# Altium PCB RPlan_LB1.PcbDoc
Units mm, origin at the board's own origin, x right, y up, seen from the top; angles counter-clockwise.
Board outline 38.2 x 43.2 mm, 2 copper layers (Top Layer, Bottom Layer); 57 components, 101 nets, 275 pads, 55 vias.
Unrouted connection lines stored in the file: 1.
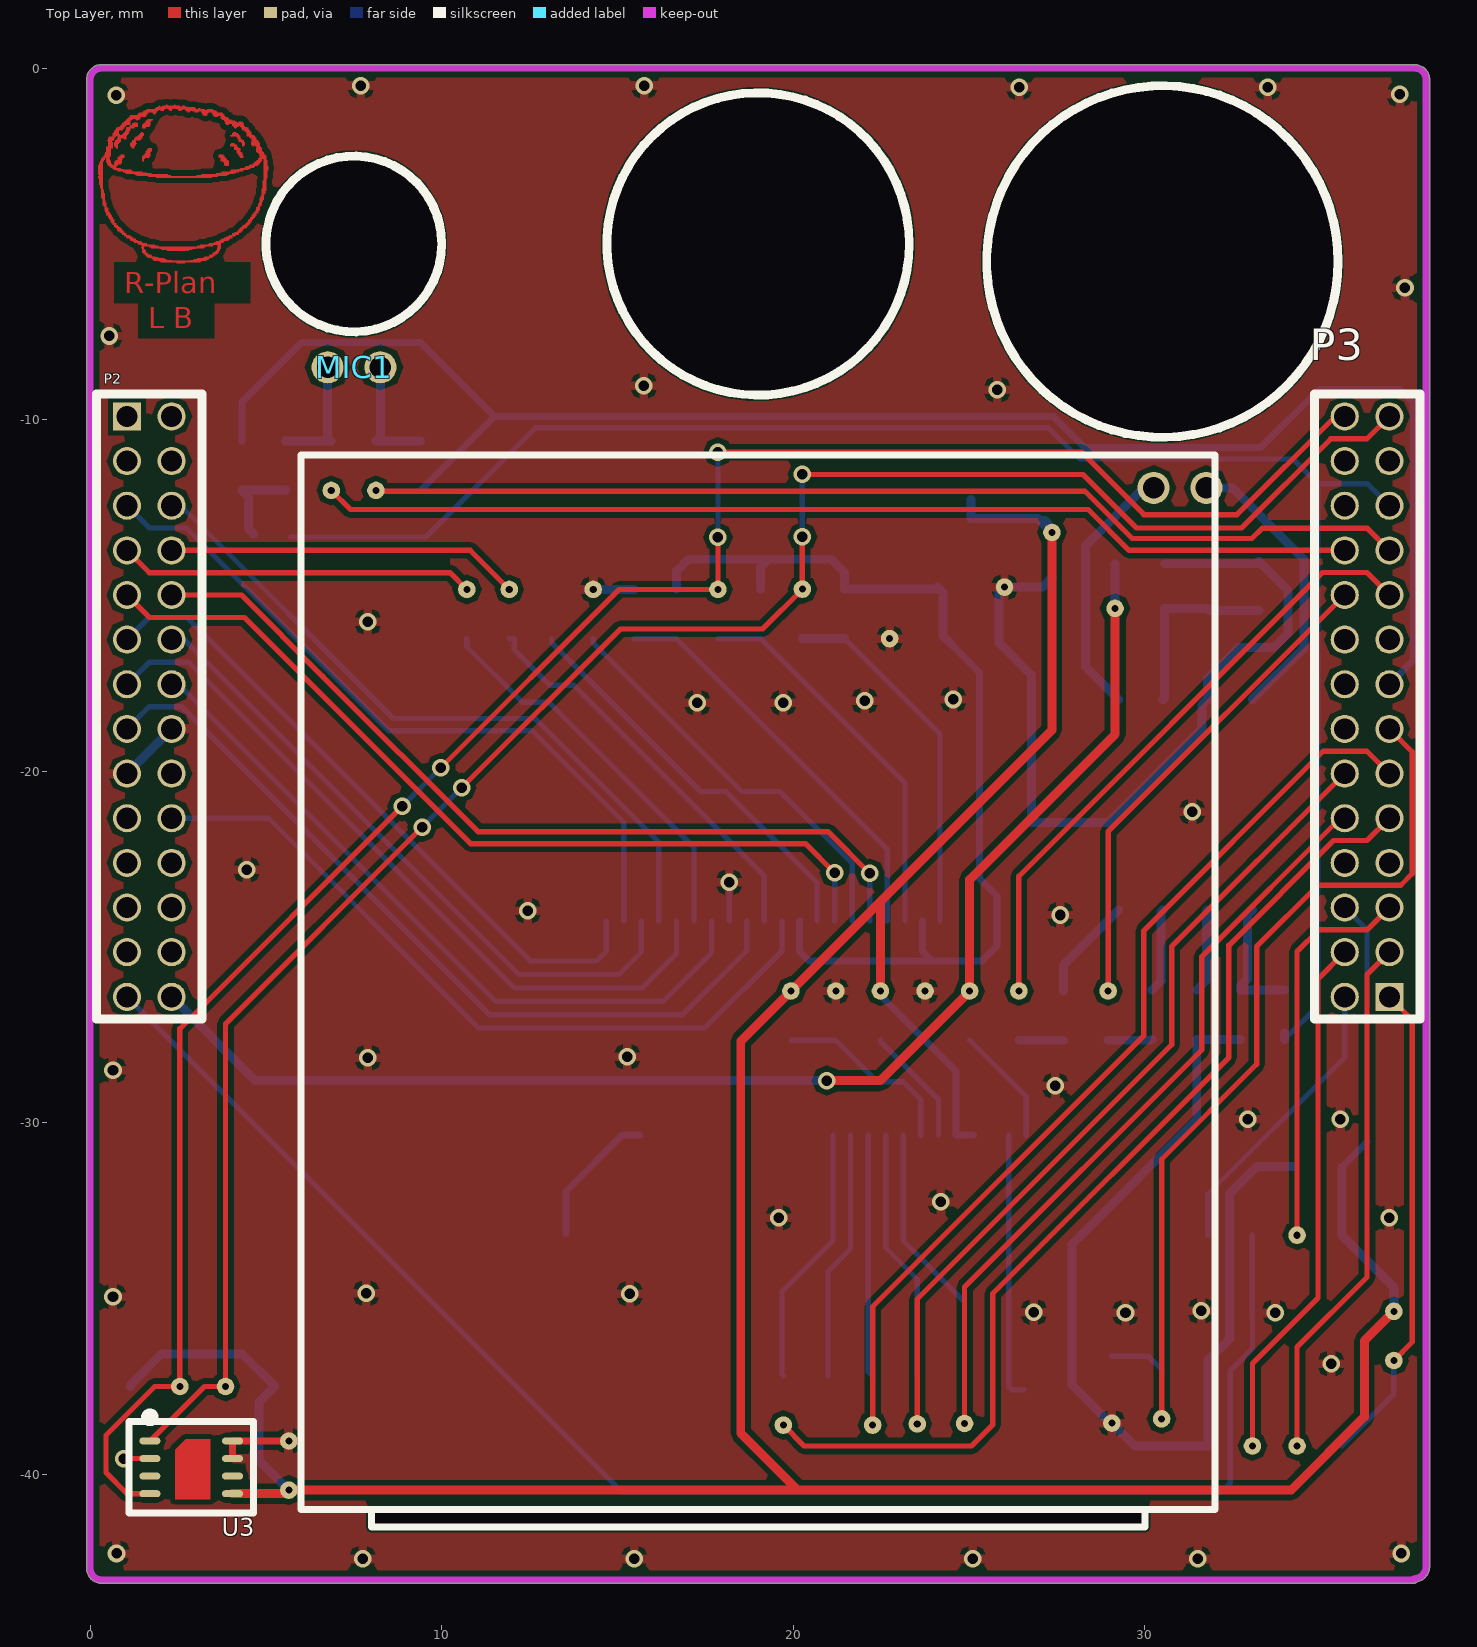
[diagram p0: Top Layer view]
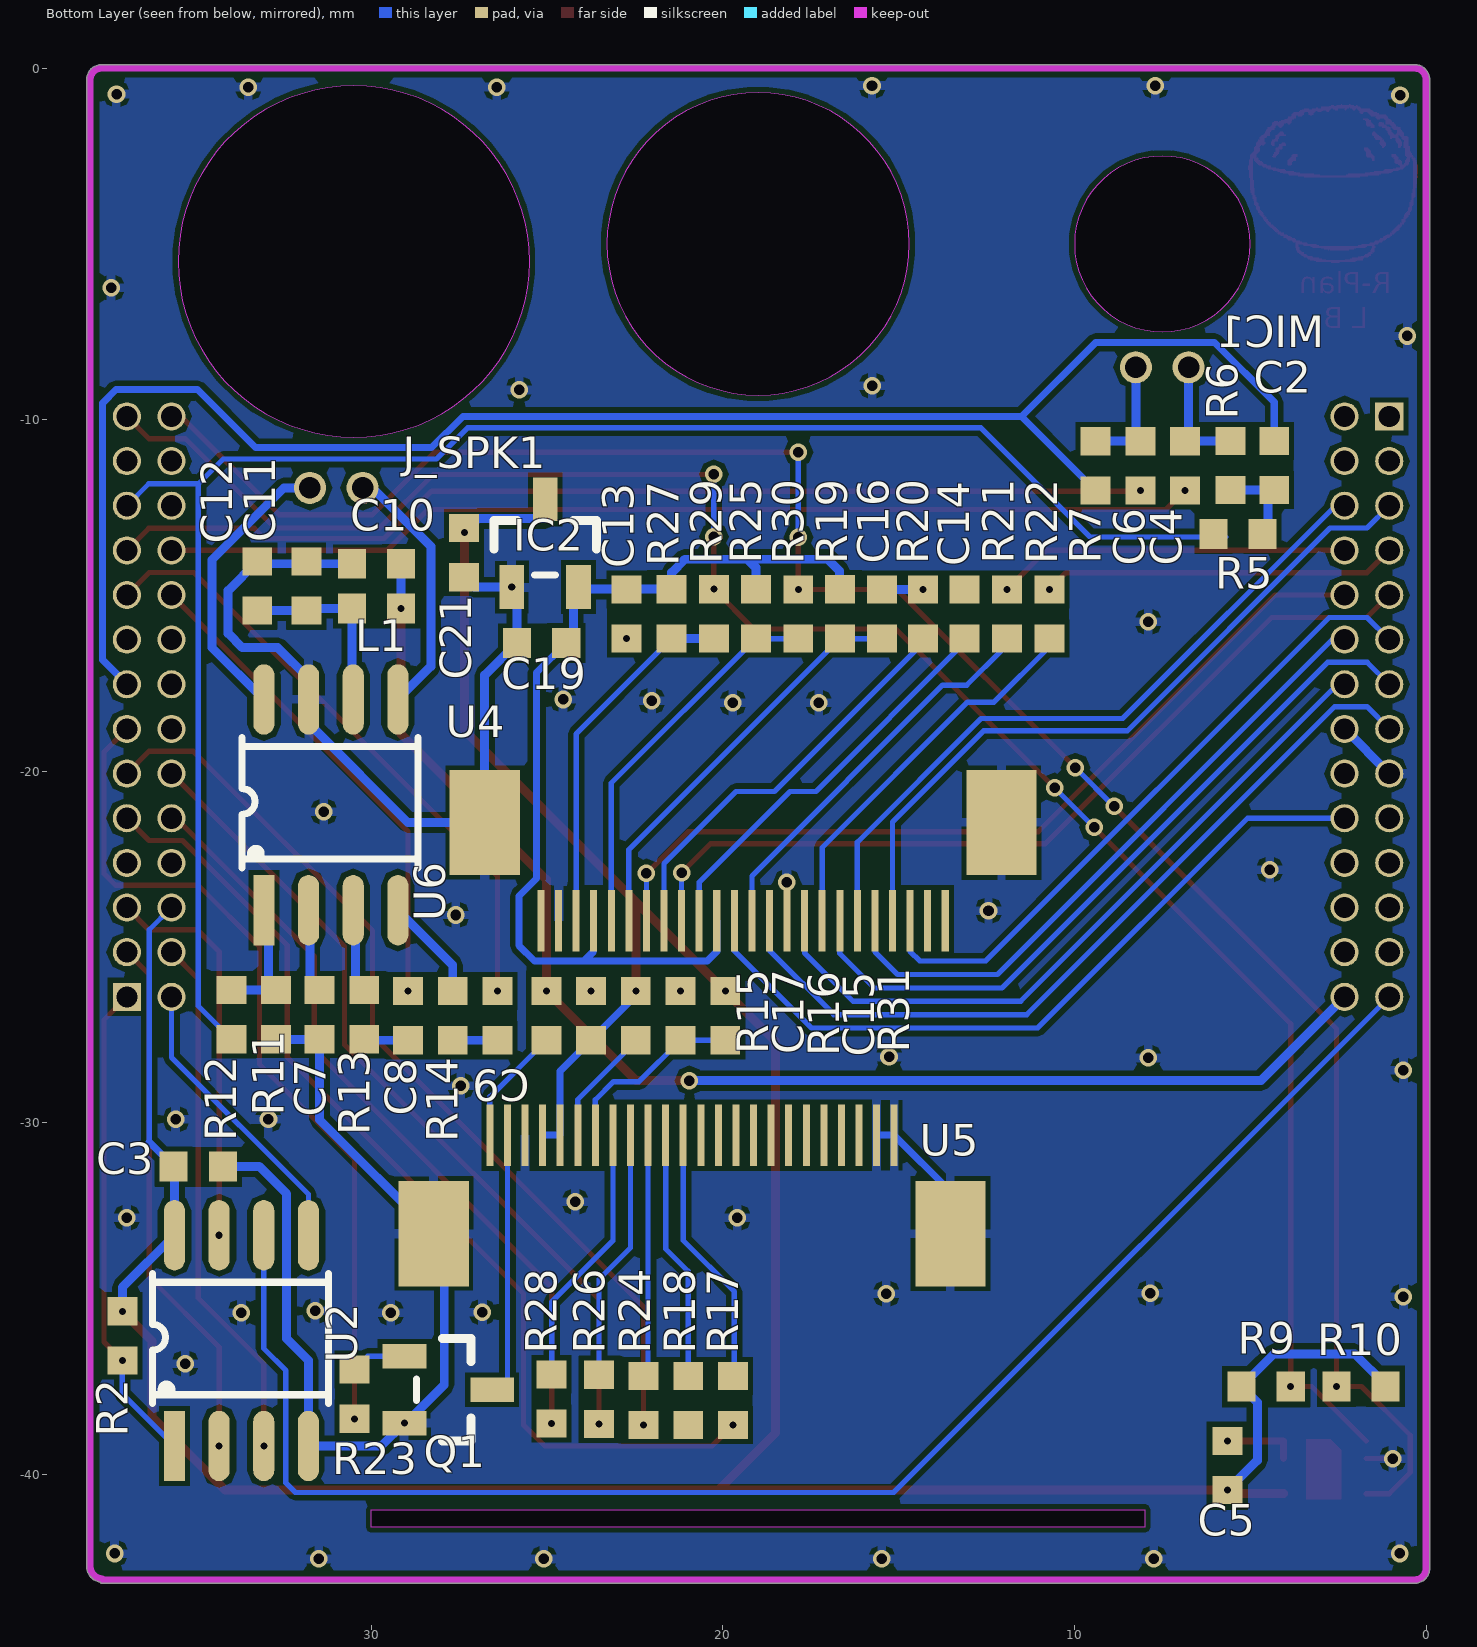
[diagram p1: Bottom Layer view, seen from below]

## Layer stack, top to bottom
Top Solder: solder mask 0.0102, Solder Resist, Dk 3.5
Top Layer: signal copper 0.0356
Dielectric 1: dielectric 0.32, FR-4, Dk 4.8
Bottom Layer: signal copper 0.0356
Bottom Solder: solder mask 0.0102, Solder Resist, Dk 3.5

## Board outline
0.322,-43.1 cw(c0.322,-42.678) -0.1,-42.678 -0.1,-0.322 cw(c0.322,-0.322) 0.322,0.1 37.678,0.1 cw(c37.678,-0.322) 38.1,-0.322 38.1,-42.619 cw(c37.649,-42.619) 37.726,-43.064 cw(c37.649,-43) 37.649,-43.1
cut-out: 7.5,-7.5 cw(c7.5,-5) 5,-5 cw(c7.5,-5) 7.5,-2.5 cw(c7.5,-5) 10,-5 cw(c7.5,-5)
cut-out: 30.5,-10.5 cw(c30.5,-5.5) 25.5,-5.5 cw(c30.5,-5.5) 30.5,-0.5 cw(c30.5,-5.5) 35.5,-5.5 cw(c30.5,-5.5)
cut-out: 19,-9.3 cw(c19,-5) 14.7,-5 cw(c19,-5) 19,-0.7 cw(c19,-5) 23.3,-5 cw(c19,-5)
cut-out: 8,-41.5 30,-41.5 30,-41 8,-41

## Design rules (kind name [scope] priority, off if disabled: settings)
Clearance [All] p1: gap=0.15 ignorepadtopadclearanceinfootprint=FALSE
PolygonConnect [All] p1: connectstyle=Relief reliefconductorwidth=0.254 reliefentries=4 polygonreliefangle="90 Angle" airgapwidth=0.127
RoutingVias [All] p1: holewidth=0.711 width=1.27 viastyle="Through Hole" minholewidth=0.711 minwidth=1.27 maxholewidth=0.711 maxwidth=1.27
SolderMaskExpansion [All] p1: expansion=0.102
Width [All] p1: maxlimit=0.254 minlimit=0.1 preferedwidth=0.254
30 further rules are at their usual default settings.

## Components (designator, comment, footprint, x,y, rotation, side; value= is the part's Value field where it differs from the comment)
C2 "225" 0603C 4.318,-11.303 r90 bottom
C3 "0.1uF" 0603C 34.925,-31.242 r0 bottom
C4 "225" 0603C 6.858,-11.311 r270 bottom
C5 "105" 0603C 5.65,-39.75 r90 bottom
C6 "225" 0603C 8.128,-11.311 r270 bottom
C7 "105" 0603C 31.478,-26.924 r270 bottom
C8 "22nf" 0603C 28.956,-26.951 r90 bottom
C9 "22nf" 0603C 26.416,-26.951 r90 bottom
C10 "106" 0603C 29.854,-14.097 r0 bottom
C11 "106" 0603C 31.85,-14.732 r90 bottom
C12 "104" 0603C 33.247,-14.732 r270 bottom
C13 "" 0603C 22.742,-15.527 r270 bottom value=0.1uF
C14 "" 0603C 13.124,-15.527 r270 bottom value=0.1uF
C15 "0.1uF" 0603C 21.209,-26.951 r270 bottom
C16 "" 0603C 15.477,-15.527 r270 bottom value=0.1uF
C17 "0.1uF" 0603C 23.749,-26.951 r90 bottom
C19 "105" 0603C 25.158,-16.348 r0 bottom
C21 "105" 0603C 27.37,-13.782 r270 bottom
IC2 "SC6206B-2.8V" SOT-23-3 25.058,-13.513 r270 bottom
J_SPK1 "Header 2" MIC_4015_DIP 31,-11.438 r0 bottom
L1 "0R" 0603C 29.854,-15.367 r0 bottom
MIC1 "MIC" MIC_4015_DIP 7.505,-8.009 r180 top
P2 "connect" CONNECT 0.254,-9.271 r0 top
P3 "connect" CONNECT 37.75,-27.051 r180 top
Q1 "S8050LT1" SOT-23-3 27.813,-37.592 r0 bottom
R2 "4.7K" 0603C 37.084,-36.061 r270 bottom
R5 "1.2K" 0603C 5.35,-13.25 r180 bottom
R6 "1.2K" 0603C 5.558,-11.303 r270 bottom
R7 "12K" 0603C 9.398,-11.311 r90 bottom
R9 "10K" 0603C 4.55,-37.5 r0 bottom
R10 "10k" 0603C 1.85,-37.5 r180 bottom
R11 "1M" 0603C 32.716,-26.924 r270 bottom
R12 "47K" 0603C 33.978,-26.924 r270 bottom
R13 "120K" 0603C 30.205,-26.924 r270 bottom
R14 "120K" 0603C 27.686,-26.951 r90 bottom
R15 "" 0603C 25.019,-26.951 r90 bottom value=30R
R16 "" 0603C 22.479,-26.951 r90 bottom value=10K
R17 "" 0603C 19.717,-37.9 r90 bottom value=10K
R18 "" 0603C 20.987,-37.9 r90 bottom value=10K
R19 "" 0603C 16.671,-15.521 r90 bottom value=10K
R20 "" 0603C 14.31,-15.527 r270 bottom value=22R
R21 "" 0603C 11.921,-15.527 r270 bottom value=22R
R22 "" 0603C 10.713,-15.527 r90 bottom value=22R
R23 "" 0603C 30.48,-37.719 r270 bottom value=10K
R24 "" 0603C 22.257,-37.9 r90 bottom value=10K
R25 "" 0603C 19.065,-15.521 r90 bottom value=10K
R26 "" 0603C 23.527,-37.865 r90 bottom value=10K
R27 "" 0603C 21.459,-15.521 r90 bottom value=10K
R28 "" 0603C 24.873,-37.854 r90 bottom value=10K
R29 "" 0603C 20.258,-15.521 r270 bottom value=22R
R30 "" 0603C 17.857,-15.527 r270 bottom value=22R
R31 "" 0603C 19.933,-26.951 r270 bottom value=10K
U2 "IPS6404L-SQ-SPN" SOP8_150mil 33.697,-36.195 r90 bottom
U3 "SHT3x" SHT3X 1.127,-38.583 r0 top
U4 "OV7670" FPC_0.5_24P_L 25.177,-24.257 r90 bottom
U5 "LCD" FPC_0.5_24P_LF 15.13,-30.353 r270 bottom
U6 "NS4150" SOP8_150mil 31.153,-20.955 r90 bottom

## Footprints (in the part's own frame and the unit in brackets; to place one, negate y for a bottom-side part, rotate by r counter-clockwise, add the part's x,y. Pads: shape width x height; smd on the part's side, far side on the other; paste and mask are expansions set on the pad)
0603C [mm] "http://www.samsungsem.com/cn/front/downloadcms.do?path=%2F%2Fcn%2F%2Fsupport%2F%2Flibrary%2F%2Fproduct-catalog%2F%2F__icsFiles%2F%2Fafieldfile%2F%2F2015%2F%2F01%2F%2F12&fileName=CHIP_RESISTOR_150112_12.pdf"
  rect 0.8x0.85 smd: 1(-0.7,0) 2(0.7,0)
  Top Layer pour cut-out: -1.245,0.584 -1.245,-0.559 1.245,-0.559 1.245,0.584
  body extent -0.85,-0.45 0.85,0.45, height 0.55
CONNECT [mm]
  rect 0.8x0.8 hole 0.6: 1(0.793,-0.635)
  round 0.8 hole 0.6: 2(2.063,-0.635) 3(0.793,-1.905) 4(2.063,-1.905) 5(0.793,-3.175) 6(2.063,-3.175) 7(0.793,-4.445) 8(2.063,-4.445) 9(0.793,-5.715) 10(2.063,-5.715) 11(0.793,-6.985) 12(2.063,-6.985) 13(0.793,-8.255) 14(2.063,-8.255) 15(0.793,-9.525) 16(2.063,-9.525) 17(0.793,-10.795) 18(2.063,-10.795) 19(0.793,-12.065) 20(2.063,-12.065) 21(0.793,-13.335) 22(2.063,-13.335) 23(0.793,-14.605) 24(2.063,-14.605) 25(0.793,-15.875) 26(2.063,-15.875) 27(0.793,-17.145) 28(2.063,-17.145)
  silkscreen extent -0.07,-17.78 2.93,0
FPC_0.5_24P_L [mm]
  rect 1.75x0.2 smd mask+0.051: 1(0,0) 2(0,-0.5) 3(0,-1) 4(0,-1.5) 5(0,-2) 6(0,-2.5) 7(0,-3) 8(0,-3.5) 9(0,-4) 10(0,-4.5) 11(0,-5) 12(0,-5.5) 13(0,-6) 14(0,-6.5) 15(0,-7) 16(0,-7.5) 17(0,-8) 18(0,-8.5) 19(0,-9) 20(0,-9.5) 21(0,-10) 22(0,-10.5) 23(0,-11) 24(0,-11.5)
  rect 3x2 smd: 25(2.8,-13.1) 26(2.8,1.6)
FPC_0.5_24P_LF [mm]
  rect 1.75x0.2 smd mask+0.051: 1(0,-11.5) 2(0,-11) 3(0,-10.5) 4(0,-10) 5(0,-9.5) 6(0,-9) 7(0,-8.5) 8(0,-8) 9(0,-7.5) 10(0,-7) 11(0,-6.5) 12(0,-6) 13(0,-5.5) 14(0,-5) 15(0,-4.5) 16(0,-4) 17(0,-3.5) 18(0,-3) 19(0,-2.5) 20(0,-2) 21(0,-1.5) 22(0,-1) 23(0,-0.5) 24(0,0)
  rect 3x2 smd: 25(2.8,-13.1) 26(2.8,1.6)
MIC_4015_DIP [mil]
  round 36 hole 24: 1(29.53,19.68) 2(-29.53,19.68)
SHT3X [mm]
  round 0 smd: 1(0.573,-0.467) 2(0.573,-0.967) 3(0.573,-1.467) 4(0.573,-1.967) 5(2.923,-1.967) 6(2.923,-1.467) 7(2.923,-0.967) 8(2.923,-0.467)
  oval 0.6x0.2 smd: 1(0.573,-0.467) 2(0.573,-0.967) 3(0.573,-1.467) 4(0.573,-1.967) 5(2.923,-1.967) 6(2.923,-1.467) 7(2.923,-0.967) 8(2.923,-0.467)
  Top Layer region: 1.286,-2.12 1.286,-0.72 1.586,-0.42 2.286,-0.42 2.286,-2.12
  silkscreen extent -0.03,-2.52 3.52,0.33
SOP8_150mil [mm]
  rect 2x0.6 smd: 1(-2.997,1.905)
  rrect100% 2x0.6 smd: 2(-2.997,0.635) 3(-2.997,-0.635) 4(-2.997,-1.905) 5(2.997,-1.905) 6(2.997,-0.635) 7(2.997,0.635) 8(2.997,1.905)
  silkscreen extent -1.79,-2.47 1.91,2.53, body extent -3.05,-2.5 2.99,2.52, height 1.6
SOT-23-3 [mm]
  rect 1.25x0.7 smd: 1(1.25,-0.95) 2(1.25,0.95) 3(-1.25,0)
  silkscreen extent -0.65,-1.46 0.9,1.46, body extent -1.5,-1.5 1.5,1.5, height 1.3

## Part data
C2 C4 C6 C12: library part CAP
C3 C15 C17 C19 C21: library part CAP, "Capacitor"
C5 C7 C8 C9 C10 C11 C13 C14 C16: library part Cap, "Capacitor", LatestRevisionDate=17-Jul-2002, LatestRevisionNote="Re-released for DXP Platform.", PackageReference=RAD-0.3, Published=8-Jun-2000, Publisher="Altium Limited"
  C13 C14 C16: PackageDescription="Radial Cap, Thru-Hole; 2 Leads; 0.3 in Pin Spacing"
IC2: library part ME6206A33M3G, "SC6206B-3V"
J_SPK1: "Header, 2-Pin", LatestRevisionDate=17-Jul-2002, LatestRevisionNote="Re-released for DXP Platform.", Publisher="Altium Limited"
L1: library part Inductor, "GZ1608D121TF", Code_IEC=1005, Code_JEITA=0402, LatestRevisionDate=17-Jul-2002, LatestRevisionNote="Re-released for DXP Platform.", PackageReference=0402-A, Published=8-Jun-2000, Publisher="Altium Limited"
Q1: library part NPN, "NPN Bipolar Transistor", Code_JEDEC=TO-226-AA, LatestRevisionDate=17-Jul-2002, LatestRevisionNote="Re-released for DXP Platform.", PackageReference=TO-226, Published=8-Jun-2000, Publisher="Altium Limited"
R2 R9 R10 R11 R12 R13 R14: library part RES, "RES"
R5 R6 R7: library part Res
R15 R16 R17 R18 R19 R20 R21 R22 R23 R24 R25 R26 R27 R28 R29 R30 R31: library part Res2, "Resistor", LatestRevisionDate=17-Jul-2002, LatestRevisionNote="Re-released for DXP Platform.", PackageDescription="Axial Device, Thru-Hole; 2 Leads; 0.4 in Pin Spacing", PackageReference=AXIAL-0.4, Published=8-Jun-2000, Publisher="Altium Limited"
U2: library part W25X16

## Free pads (board coordinates)
  round 0.5 hole 0.2: 57(26.416,-26.251) 58(28.956,-26.251) 59(6.858,-12.011) 60(8.128,-12.011) 61(20.258,-14.821) 62(17.857,-14.827) 63(11.921,-14.827) 64(10.713,-14.827) 65(34.332,-33.198) 68(34.332,-39.192) 69(33.062,-39.192) 70(37.084,-36.761) 71(24.873,-38.554) 72(23.527,-38.565) 73(22.257,-38.6) 74(19.717,-38.6) 75(30.48,-38.419) 76(22.479,-26.251) 77(19.933,-26.251) 78(27.357,-13.208) 79(37.084,-35.361) 88(29.154,-15.367) 89(25.019,-26.251) 91(23.749,-26.251) 103(3.85,-37.5) 104(2.55,-37.5) 105(5.65,-40.45) 107(21.209,-26.251) 108(14.31,-14.827) 109(22.742,-16.227) 110(5.65,-39.05) 117(29.063,-38.542) 118(26.008,-14.763)

## Via types
v1: diameter 0.5, hole 0.3, Top Layer to Bottom Layer, 55 vias

## Nets (pads, with @x,y where several pads share a name; then routed paths per layer and width w, separated by ;. In a path a pad name is that pad's centre, name@x,y a point inside that pad or via, vN(x,y) a via of type N, cw(c..) or ccw(c..) an arc to the next point about the centre after c; other vN are vias at no path point)
AGND: C2.2 P3.15 R7.1 | length 48.5
  Bottom Layer w0.2: C2.2 4.318,-9.5 6.018,-7.8 9.397,-7.8 11.503,-9.906 ; R7.1 11.503,-9.906 ; P3.15 37.643,-16.84 37.643,-9.525 37.26,-9.142 34.952,-9.142 33.299,-10.795 28.286,-10.795 27.397,-9.906 11.503,-9.906
AUDLN: C9.2 P3.19 pad.57 | length 17.6
  Top Layer w0.15: pad.57 26.416,-22.987 35.055,-14.348 36.319,-14.348 P3.19
AUDLP: C8.2 P3.20 pad.58 | length 14.2
  Top Layer w0.15: pad.58 28.956,-21.717 P3.20
  Top Layer w0.254: P3.20@35.563,-14.986 P3.20
AUDRN: P3.17
AUDRP: P3.16
CAM_PWND: R20.2 U4.8 | length 11.7
  Bottom Layer w0.15: R20.2 14.31,-16.35 18.535,-20.574 19.626,-20.574 21.677,-22.625 U4.8
CAM_RST: C16.2 R19.1 U4.6 | length 11.7
  Bottom Layer w0.15: C16.2 16.665,-16.227 R19.1 22.677,-22.227 U4.6
CEN: P3.7
GND: C3.1 C5.2 C7.2 C10.2 C11.2 C12.1 C13.2 C15.1 C16.1 C17.2 C19.2 C21.2 IC2.1 P2.16 P2.17 pad.91 pad.107 pad.108 pad.109 pad.110 pad.117 pad.118 Q1.2 R11.2 R20.1 U2.4 U3.2 U3.7 U3.8 U4.2 U4.15 U4.25 U4.26 U5.3 U5.23 U5.24 U5.25 U5.26 U6.7 | length 61.6
  Top Layer w0.15: v1(0.95,-39.55) U3.2@1.7,-39.55
  Top Layer w0.2: U3.7@4.05,-39.55 4.05,-39.05 pad.110
  Bottom Layer w0.15: U4.15 18.177,-23.164 v1(18.182,-23.16)
  Bottom Layer w0.2: U5.26 13.53,-31.953 U5.24 U5.23
  Bottom Layer w0.254: P2.17 P2.16 ; pad.108 C16.1 ; C21.2 27.089,-14.763 pad.118 25.858,-14.913 C19.2 26.777,-17.267 U4.26 28.962,-21.457 31.623,-18.796 31.623,-18.122 U6.7 31.788,-17.361 32.668,-16.481 33.673,-16.481 34.075,-16.08 34.075,-14.86 C12.1 33.182,-14.097 C10.2 ; R11.2 C7.2 31.478,-29.905 U5.25 27.929,-33.454 27.929,-37.454 29.017,-38.542 pad.117 29.713,-39.192 U2.4 31.792,-36.758 32.413,-36.136 32.413,-32.023 33.195,-31.242 C3.1
  other v1: 7.75,-42.4 15.477,-42.4 25.1,-42.4 31.5,-42.4 0.75,-42.25 37.3,-42.25 35.3,-36.85 29.45,-35.4 33.707,-35.399 26.845,-35.384 31.6,-35.35 0.65,-34.95 7.85,-34.85 15.35,-34.861 19.59,-32.7 36.957,-32.7 24.2,-32.25 32.928,-29.9 35.56,-29.9 27.456,-28.95 0.65,-28.5 7.9,-28.151 15.276,-28.124 27.597,-24.088 12.446,-23.964 4.45,-22.8 31.35,-21.15 17.272,-18.05 19.717,-18.05 22.029,-18 24.548,-17.958 7.9,-15.75 25.8,-9.142 15.75,-9.036 0.537,-7.618 37.4,-6.25 0.741,-0.774 37.25,-0.737 26.429,-0.543 33.5,-0.543 7.7,-0.5 15.76,-0.5
IN_N: R14.2 U6.4 | length 2.9
  Bottom Layer w0.254: R14.2 27.686,-25.514 U6.4
IN_P: R13.1 U6.3 | length 2.4
  Bottom Layer w0.254: R13.1 30.477,-25.952 30.455,-25.952 30.455,-24.015 U6.3
LINEL: P3.24
MCLK: R21.2 U4.13 | length 11.5
  Bottom Layer w0.15: R21.2 12.066,-16.227 12.066,-16.55 13.066,-17.55 13.75,-17.55 19.177,-22.977 U4.13
MIC_N: C6.1 MIC1.2 R7.2 | length 3.4
  Bottom Layer w0.254: MIC1.2 8.255,-10.484 C6.1 R7.2
MIC_P: C4.1 MIC1.1 R6.1 | length 3.3
  Bottom Layer w0.254: R6.1 6.85,-10.603 C4.1 ; C4.1@6.755,-10.508 MIC1.1
MICBIAS: P3.23 R5.1 R12.2 | length 49.8
  Bottom Layer w0.15: R5.1@5.7,-13.335 9.556,-13.335 12.66,-10.231 27.262,-10.231 28.151,-11.12 34.216,-11.12 34.925,-11.829 34.925,-26.677 R12.2 ; 34.925,-11.821 36.332,-11.821 P3.23
  Bottom Layer w0.254: R12.2 R12.2@33.978,-27.449
MICLN: C6.2 P3.21 pad.60 | length 29.8
  Top Layer w0.15: pad.60 8.149,-12.032 28.293,-12.032 29.642,-13.381 33.043,-13.381 33.333,-13.091 36.332,-13.091 P3.21
MICLP: C4.2 P3.22 pad.59 | length 29.5
  Top Layer w0.15: pad.59 7.403,-12.556 28.392,-12.556 29.553,-13.716 P3.22
MUTE: R11.1 R12.1 U6.1 | length 3.7
  Bottom Layer w0.254: U6.1 32.922,-24.088 32.922,-25.908 32.716,-26.113 R11.1 R12.1
NetC2_1: C2.1 R5.2 R6.2 | length 2.6
  Bottom Layer w0.254: R5.2 4.5,-13.1 4.5,-12.185 C2.1 R6.2
NetC7_1: C7.1 U6.2 | length 2.9
  Bottom Layer w0.254: C7.1 31.75,-25.952 31.75,-23.99 U6.2 U6.2@31.788,-24.454
NetC8_1: C8.1 R13.2 | length 1.3
  Bottom Layer w0.254: C8.1 30.178,-27.651 R13.2
NetC9_1: C9.1 R14.1 | length 1.3
  Bottom Layer w0.254: C9.1 R14.1
NetC14_2: C14.2 U4.10 | length 11.6
  Bottom Layer w0.15: C14.2 13.124,-16.34 17.358,-20.574 18.091,-20.574 20.677,-23.16 U4.10
NetC15_2: C15.2 R31.2 U5.7 | length 5.4
  Bottom Layer w0.15: R31.2 C15.2 22.387,-28.829 23.114,-28.829 23.63,-29.345 U5.7
NetC18_1: 
NetD1_2: 
NetD2_1: 
NetD2_2: 
NetD4_2: 
NetIC1_2: 
NetQ1_1: Q1.1 R23.1 | length 1.6
  Bottom Layer w0.15: Q1.1 30.103,-36.642 R23.1
NetQ1_3: Q1.3 U5.2 | length 7.6
  Bottom Layer w0.15: U5.2 26.13,-37.504 26.218,-37.592 Q1.3
NetR3_1: 
NetR4_1: 
NetR15_1: R15.1 U5.1 | length 3.4
  Bottom Layer w0.15: R15.1 26.63,-29.262 U5.1
NetR16_1: R16.1 U5.6 | length 3.4
  Bottom Layer w0.15: R16.1 22.479,-27.686 24.13,-29.337 U5.6
NetR17_2: R17.2 U5.12 | length 7.5
  Bottom Layer w0.15: R17.2 19.677,-37.16 19.677,-34.801 21.13,-33.348 U5.12
NetR18_2: R18.2 U5.11 | length 7.1
  Bottom Layer w0.15: R18.2 20.987,-34.225 21.63,-33.582 U5.11
NetR24_2: R24.2 U5.10 | length 6.9
  Bottom Layer w0.15: U5.10 22.13,-37.073 R24.2
NetR26_2: R26.2 U5.9 | length 7.2
  Bottom Layer w0.15: U5.9 22.63,-33.552 23.527,-34.449 R26.2
NetR28_2: R28.2 U5.8 | length 7.5
  Bottom Layer w0.15: U5.8 23.13,-33.352 24.873,-35.095 R28.2
NetR32_1: 
NetR33_2: 
NetR34_1: 
NetR35_2: 
P0: P3.28 pad.62 pad.104 R10.1 R30.1 U3.4 | length 59.5
  Top Layer w0.15: U3.4@1.7,-40.55 1.05,-40.55 0.45,-39.95 0.45,-38.886 1.836,-37.5 pad.104 2.55,-27.323 v1(8.873,-21) ; v1(9.973,-19.9) 15.046,-14.827 pad.62 v1(17.857,-13.348) ; v1(17.857,-10.922) 28.194,-10.922 29.972,-12.7 32.622,-12.7 35.416,-9.906 P3.28
  Bottom Layer w0.15: v1(8.873,-21) v1(9.973,-19.9) ; v1(17.857,-13.348) v1(17.857,-10.922)
P1: P3.27 pad.61 pad.103 R9.1 R29.1 U3.1 | length 56.6
  Top Layer w0.15: U3.1@1.7,-39.05 3.25,-37.5 pad.103 3.85,-27.185 v1(9.442,-21.593) ; v1(10.567,-20.467) 15.085,-15.95 19.129,-15.95 pad.61 v1(20.258,-13.335) ; v1(20.258,-11.557) 28.242,-11.557 29.766,-13.081 32.751,-13.081 35.291,-10.541 36.322,-10.541 P3.27
  Bottom Layer w0.15: v1(9.442,-21.593) v1(10.567,-20.467) ; v1(20.258,-11.557) v1(20.258,-13.335) v1@20.32,-13.273
P2: P3.12 pad.72 R26.1 | length 23.5
  Top Layer w0.15: pad.72 23.527,-35.014 30.763,-27.778 30.763,-24.99 P3.12
P3: P3.10 pad.71 R28.1 | length 21.8
  Top Layer w0.15: pad.71 24.873,-34.671 31.623,-27.921 31.623,-25.273 35.56,-21.336 P3.10
P4: P3.11 pad.73 R24.1 | length 26.6
  Top Layer w0.15: pad.73 22.257,-35.231 29.972,-27.516 29.972,-24.53 35.071,-19.431 36.322,-19.431 P3.11
P5: P3.9 pad.74 R17.1 | length 28.9
  Top Layer w0.15: pad.74 20.309,-39.192 25.07,-39.192 25.671,-38.591 25.671,-34.861 32.391,-28.141 32.391,-24.952 35.372,-21.971 36.322,-21.971 P3.9
P6: P3.13 pad.75 R23.2 | length 24.2
  Top Layer w0.15: pad.75 30.48,-31.037 33.182,-28.335 33.182,-24.984 34.925,-23.241 37.28,-23.241 37.609,-22.912 37.609,-19.448 P3.13
P7: P3.14
P10: P3.25
P11: P3.26
P12: P2.3
P13: P2.4
P14: P2.23
P15: P2.25
P16: P2.24
P17: P2.22
P18: P2.26
P19: P2.21
P20: P3.5 pad.65 U2.7 | length 11.2
  Top Layer w0.15: pad.65 34.332,-25.128 34.949,-24.511 36.322,-24.511 P3.5
P21: P3.4 pad.69 U2.3 | length 15.1
  Top Layer w0.15: pad.69 33.062,-36.846 34.925,-34.982 34.925,-25.908 P3.4
P22: P3.3 pad.68 U2.2 | length 15.1
  Top Layer w0.15: pad.68 34.332,-36.38 36.319,-34.392 36.319,-25.784 P3.3
P23: P3.2 U2.5 | length 8.4
  Bottom Layer w0.15: U2.5 31.792,-32.033 35.687,-28.138 P3.2
P24: P2.27 U2.6 | length 44.6
  Bottom Layer w0.15: P2.27 15.144,-40.513 32.163,-40.513 32.434,-40.243 32.434,-37.046 33.062,-36.418 33.062,-35.542 33.059,-35.539 33.059,-33.201 U2.6
P25: P2.2
P26: P3.1 pad.70 R2.2 U2.1 | length 13.9
  Top Layer w0.15: P3.1 37.609,-27.068 37.609,-36.236 pad.70
  Bottom Layer w0.15: U2.1 37.084,-37.71 pad.70
P27: P2.8 pad.63 R21.1 | length 10.2
  Top Layer w0.15: P2.8 10.811,-13.716 pad.63
  Bottom Layer w0.15: pad.63 pad.63@11.921,-14.691
P28: P2.1
P29: P2.7 pad.64 R22.2 | length 10.1
  Top Layer w0.15: P2.7 1.682,-14.351 10.238,-14.351 pad.64
P30: P2.9 U4.9 | length 24.8
  Top Layer w0.15: P2.9 1.688,-15.627 4.39,-15.627 10.822,-22.059 20.349,-22.059 v1(21.177,-22.887)
  Bottom Layer w0.15: U4.9 v1(21.177,-22.887)
P31: P2.10 U4.7 | length 24.5
  Top Layer w0.15: P2.10 4.3,-14.986 6.614,-17.3 11.031,-21.717 20.988,-21.717 v1(22.177,-22.906)
  Bottom Layer w0.15: U4.7 v1(22.177,-22.906)
P32: P2.6 U4.19 | length 20.1
  Bottom Layer w0.15: P2.6 2.577,-12.446 8.631,-18.5 12.658,-18.5 16.177,-22.019 U4.19
P33: P2.5 U4.21 | length 20.7
  Bottom Layer w0.15: P2.5 1.683,-13.082 2.732,-13.082 8.5,-18.85 12.584,-18.85 15.177,-21.443 U4.21
P34: P2.11 U4.22 | length 18.9
  Bottom Layer w0.15: P2.11 1.676,-15.627 2.754,-15.627 12.527,-25.4 14.399,-25.4 14.677,-25.122 U4.22
P35: P2.12 U4.20 | length 18.5
  Bottom Layer w0.15: P2.12 2.667,-16.256 12.192,-25.781 15.036,-25.781 15.677,-25.14 U4.20
P36: P2.13 U4.18 | length 21.1
  Bottom Layer w0.15: P2.13 1.672,-16.901 2.804,-16.901 12.065,-26.162 15.698,-26.162 16.677,-25.183 U4.18
P37: P2.14 U4.16 | length 20.6
  Bottom Layer w0.15: P2.14 2.515,-17.526 11.532,-26.543 16.302,-26.543 17.677,-25.168 U4.16
P38: P2.15 U4.14 | length 23.1
  Bottom Layer w0.15: P2.15 1.682,-18.161 2.596,-18.161 11.359,-26.924 16.846,-26.924 18.677,-25.093 U4.14
P39: P2.20 U4.12 | length 21.6
  Bottom Layer w0.15: P2.20 5.08,-21.336 11.049,-27.305 17.479,-27.305 19.677,-25.107 U4.12
PCLK: R22.1 U4.17 | length 11.2
  Bottom Layer w0.15: R22.1 10.713,-16.458 12.289,-18.034 13.044,-18.034 17.177,-22.167 U4.17
SCL: R25.1 R30.2 U4.5 | length 11
  Bottom Layer w0.15: R30.2 19.06,-16.227 R25.1 23.177,-20.333 U4.5
SDA: R27.1 R29.2 U4.3 | length 10.4
  Bottom Layer w0.15: R27.1 24.177,-18.939 U4.3
  Bottom Layer w0.254: R29.2 R27.1
SPK_VDD: C11.1 C12.2 L1.2 U6.6 | length 5.3
  Bottom Layer w0.254: U6.6 30.554,-17.921 L1.2 31.785,-15.367 C11.1 C12.2
USBN: 
USBP: 
V1.8: C14.1
V2.8: C13.1 C19.1 IC2.2 R19.2 R25.2 R27.2 U4.4 U4.11 | length 28.6
  Bottom Layer w0.2: U4.11 20.177,-25.13 20.447,-25.4 25.363,-25.4 25.8,-24.963 25.8,-23.551 25.3,-23.051 25.3,-17.19 C19.1 ; U4.4 23.677,-25.119 23.917,-25.359
  Bottom Layer w0.254: R19.2 16.684,-14.808 16.684,-14.304 17.018,-13.97 19.304,-13.97 ; R25.2 19.065,-14.209 19.304,-13.97 ; C19.1 24.257,-16.147 24.257,-14.912 IC2.2 24.05,-14.821 R27.2 21.459,-14.348 21.081,-13.97 19.304,-13.97
VBAT: P2.18
VCOM: P3.18
VDD: C3.2 C5.1 C17.1 C21.1 IC2.3 P3.6 pad.76 pad.77 pad.78 pad.79 pad.105 R2.1 R9.2 R10.2 R16.2 R31.1 U2.8 U3.5 U5.4 U5.5 | length 100.4
  Top Layer w0.254: U3.5@4.05,-40.55 5.55,-40.55 pad.105 34.158,-40.45 36.244,-38.364 36.244,-36.201 pad.79 ; 20.115,-40.435 18.506,-38.826 18.506,-27.678 pad.77 27.357,-18.827 pad.78 ; pad.76 22.479,-23.75
  Bottom Layer w0.15: P3.6 36.319,-24.508 36.319,-30.548
  Bottom Layer w0.2: pad.76 22.479,-26.381 C17.1 24.63,-28.532 U5.5 U5.4 ; C3.2@35.602,-31.265 C3.2 36.319,-30.548
  Bottom Layer w0.254: R10.2 1.15,-37.45 2.024,-36.576 4.326,-36.576 R9.2 4.8,-37.95 4.8,-39.6 pad.105 ; IC2.3 25.058,-12.81 26.959,-12.81 pad.78 ; C21.1@27.151,-12.863 C21.1 ; C3.2@35.602,-31.265 U2.8 37.084,-34.68 pad.79
VDDRAM: 
VIO: P3.8
VO_N: J_SPK1.2 U6.5 | length 7.5
  Bottom Layer w0.254: U6.5 28.309,-17.019 28.309,-13.601 30.099,-11.811 J_SPK1.2@30.35,-11.811
VO_P: J_SPK1.1 U6.8 | length 8.2
  Bottom Layer w0.254: J_SPK1.1@31.85,-11.811 31.977,-11.938 32.487,-11.938 34.534,-13.985 34.534,-16.481 U6.8
VPWR: C10.1 L1.1 P2.28 pad.88 pad.89 R15.2 | length 38.6
  Top Layer w0.254: v1(20.955,-28.8) 22.47,-28.8 pad.89 25.019,-23.081 29.154,-18.946 pad.88
  Bottom Layer w0.254: P2.28 4.701,-28.8 v1(20.955,-28.8) ; pad.88 C10.1
VUSB: P2.19
pads on no net: R18.1 U3.3 U3.6 U4.1 U4.23 U4.24 U5.13 U5.14 U5.15 U5.16 U5.17 U5.18 U5.19 U5.20 U5.21 U5.22
copper on no net: | length 103.5
  Top Layer w0.025: 0.233,-3.123 0.36,-3.123 ; 0.233,-3.097 0.36,-3.097 ; 0.233,-3.072 0.36,-3.072 ; 0.233,-3.021 0.36,-3.021 ; 0.233,-2.996 0.36,-2.996 ; 0.233,-2.97 0.36,-2.97 ; 0.233,-2.945 0.36,-2.945 ; 0.233,-2.919 0.36,-2.919 ; 0.233,-2.894 0.36,-2.894 ; 0.233,-2.869 0.36,-2.869 ; 0.233,-2.843 0.36,-2.843 ; 0.233,-2.818 0.36,-2.818 ; 0.233,-2.792 0.36,-2.792 ; 0.233,-2.767 0.36,-2.767 ; 0.258,-3.3 0.36,-3.3 ; 0.258,-3.275 0.36,-3.275 ; 0.258,-3.25 0.36,-3.25 ; 0.258,-3.224 0.36,-3.224 ; 0.258,-3.199 0.36,-3.199 ; 0.258,-3.173 0.36,-3.173 ; 0.258,-3.148 0.36,-3.148 ; 0.258,-3.046 0.36,-3.046 ; 0.258,-2.742 0.36,-2.742 ; 0.258,-2.716 0.36,-2.716 ; 0.258,-2.691 0.36,-2.691 ; 0.283,-3.402 0.36,-3.402 ; 0.283,-3.377 0.36,-3.377 ; 0.283,-3.351 0.36,-3.351 ; 0.283,-3.326 0.36,-3.326 ; 0.283,-2.665 0.36,-2.665 ; 0.283,-2.64 0.385,-2.64 ; 0.309,-3.656 0.41,-3.656 ; 0.309,-3.631 0.41,-3.631 ; 0.309,-3.605 0.41,-3.605 ; 0.309,-3.58 0.41,-3.58 ; 0.309,-3.554 0.41,-3.554 ; 0.309,-3.529 0.385,-3.529 ; 0.309,-3.504 0.385,-3.504 ; 0.309,-3.478 0.385,-3.478 ; 0.309,-3.453 0.385,-3.453 ; 0.309,-3.427 0.36,-3.427 ; 0.309,-2.615 0.385,-2.615 ; 0.309,-2.589 0.41,-2.589 ; 0.309,-2.564 0.41,-2.564 ; 0.334,-3.707 0.41,-3.707 ; 0.334,-3.681 0.41,-3.681 ; 0.36,-3.885 0.461,-3.885 ; 0.36,-3.859 0.461,-3.859 ; 0.36,-3.834 0.461,-3.834 ; 0.36,-3.808 0.436,-3.808 ; 0.36,-3.783 0.436,-3.783 ; 0.36,-3.758 0.436,-3.758 ; 0.36,-3.732 0.41,-3.732 ; 0.36,-2.538 0.537,-2.538 ; 0.36,-2.513 0.563,-2.513 ; 0.385,-3.91 0.461,-3.91 ; 0.385,-2.488 0.588,-2.488 ; 0.41,-4.037 0.512,-4.037 ; 0.41,-4.012 0.512,-4.012 ; 0.41,-3.986 0.512,-3.986 ; 0.41,-3.961 0.487,-3.961 ; 0.41,-3.935 0.461,-3.935 ; 0.41,-2.462 0.588,-2.462 ; 0.41,-2.437 0.588,-2.437 ; 0.436,-4.088 0.537,-4.088 ; 0.436,-4.062 0.512,-4.062 ; 0.436,-2.411 0.588,-2.411 ; 0.436,-2.386 0.588,-2.386 ; 0.461,-4.164 0.588,-4.164 ; 0.461,-4.139 0.588,-4.139 ; 0.461,-4.113 0.563,-4.113 ; 0.461,-2.665 0.588,-2.665 ; 0.461,-2.64 0.588,-2.64 ; 0.461,-2.615 0.563,-2.615 ; 0.461,-2.589 0.563,-2.589 ; 0.461,-2.564 0.537,-2.564 ; 0.461,-2.361 0.588,-2.361 ; 0.461,-2.335 0.588,-2.335 ; 0.461,-2.31 0.588,-2.31 ; 0.461,-2.284 0.588,-2.284 ; 0.461,-2.259 0.639,-2.259 ; 0.461,-2.234 0.639,-2.234 ; 0.487,-2.716 0.614,-2.716 ; 0.487,-2.691 0.588,-2.691 ; 0.487,-2.056 0.639,-2.056 ; 0.512,-4.24 0.639,-4.24 ; 0.512,-4.215 0.614,-4.215 ; 0.512,-4.189 0.614,-4.189 ; 0.512,-2.767 0.766,-2.767 ; 0.512,-2.742 0.639,-2.742 ; 0.512,-2.208 0.639,-2.208 ; 0.512,-2.183 0.639,-2.183 ; 0.512,-2.157 0.639,-2.157 ; 0.512,-2.132 0.639,-2.132 ; 0.512,-2.107 0.639,-2.107 ; 0.512,-2.081 0.614,-2.081 ; 0.512,-2.03 0.664,-2.03 ; 0.512,-2.005 0.69,-2.005 ; 0.512,-1.98 0.69,-1.98 ; 0.537,-4.266 0.639,-4.266 ; 0.537,-1.954 0.715,-1.954 ; 0.563,-4.291 0.664,-4.291 ; 0.563,-2.792 0.741,-2.792 ; 0.588,-4.367 0.69,-4.367 ; 0.588,-4.342 0.69,-4.342 ; 0.588,-4.316 0.69,-4.316 ; 0.588,-2.818 0.741,-2.818 ; 0.614,-4.393 0.69,-4.393 ; 0.639,-4.443 0.741,-4.443 ; 0.639,-4.418 0.741,-4.418 ; 0.639,-2.843 0.868,-2.843 ; 0.639,-1.929 0.741,-1.929 ; 0.639,-1.903 1.045,-1.903 ; 0.639,-1.878 0.842,-1.878 ; 0.639,-1.853 0.817,-1.853 ; 0.664,-2.869 0.944,-2.869 ; 0.664,-1.827 0.817,-1.827 ; 0.69,-4.494 0.817,-4.494 ; 0.69,-4.469 0.791,-4.469 ; 0.69,-2.742 0.791,-2.742 ; 0.69,-2.716 0.868,-2.716 ; 0.69,-2.691 0.893,-2.691 ; 0.69,-2.665 0.893,-2.665 ; 0.69,-2.208 0.791,-2.208 ; 0.69,-2.183 0.791,-2.183 ; 0.69,-2.157 0.791,-2.157 ; 0.69,-2.132 0.817,-2.132 ; 0.69,-2.107 0.842,-2.107 ; 0.69,-1.802 0.817,-1.802 ; 0.69,-1.776 0.817,-1.776 ; 0.715,-4.52 0.842,-4.52 ; 0.715,-2.64 0.893,-2.64 ; 0.715,-2.234 0.791,-2.234 ; 0.715,-2.081 0.868,-2.081 ; 0.715,-2.056 0.868,-2.056 ; 0.715,-1.751 0.918,-1.751 ; 0.741,-4.545 0.868,-4.545 ; 0.741,-2.894 1.172,-2.894 ; 0.741,-2.615 0.893,-2.615 ; 0.741,-2.259 0.791,-2.259 ; 0.741,-2.03 0.868,-2.03 ; 0.741,-1.726 0.944,-1.726 ; 0.741,-1.7 0.969,-1.7 ; 0.766,-4.596 0.918,-4.596 ; 0.766,-4.57 0.893,-4.57 ; 0.766,-2.005 0.868,-2.005 ; 0.791,-4.621 0.944,-4.621 ; 0.791,-2.919 1.198,-2.919 ; 0.791,-2.589 0.918,-2.589 ; 0.791,-2.564 0.918,-2.564 ; 0.791,-2.538 0.969,-2.538 ; 0.791,-1.98 1.02,-1.98 ; 0.791,-1.954 1.02,-1.954 ; 0.791,-1.929 1.02,-1.929 ; 0.791,-1.675 0.969,-1.675 ; 0.817,-2.513 0.969,-2.513 ; 0.842,-4.647 0.969,-4.647 ; 0.842,-2.488 0.969,-2.488 ; 0.842,-1.649 0.995,-1.649 ; 0.868,-4.672 0.969,-4.672 ; 0.868,-2.462 0.969,-2.462 ; 0.868,-1.624 1.02,-1.624 ; 0.893,-4.697 1.02,-4.697 ; 0.893,-1.599 1.147,-1.599 ; 0.918,-4.723 1.02,-4.723 ; 0.918,-1.878 1.071,-1.878 ; 0.918,-1.573 1.147,-1.573 ; 0.918,-1.548 1.147,-1.548 ; 0.944,-2.945 1.477,-2.945 ; 0.944,-1.853 1.096,-1.853 ; 0.969,-4.774 1.147,-4.774 ; 0.969,-4.748 1.122,-4.748 ; 0.969,-2.005 1.02,-2.005 ; 0.969,-1.827 1.096,-1.827 ; 0.969,-1.522 1.147,-1.522 ; 0.995,-2.97 1.604,-2.97 ; 0.995,-1.802 1.096,-1.802 ; 0.995,-1.776 1.122,-1.776 ; 0.995,-1.497 1.147,-1.497 ; 1.02,-4.799 1.198,-4.799 ; 1.02,-1.751 1.147,-1.751 ; 1.02,-1.726 1.147,-1.726 ; 1.02,-1.7 1.249,-1.7 ; 1.02,-1.472 1.172,-1.472 ; 1.045,-4.824 1.223,-4.824 ; 1.045,-2.996 1.731,-2.996 ; 1.045,-1.675 1.249,-1.675 ; 1.045,-1.446 1.198,-1.446 ; 1.071,-1.421 1.426,-1.421 ; 1.096,-1.395 1.426,-1.395 ; 1.122,-4.85 1.299,-4.85 ; 1.122,-1.649 1.35,-1.649 ; 1.122,-1.37 1.579,-1.37 ; 1.147,-4.875 1.299,-4.875 ; 1.147,-2.208 1.274,-2.208 ; 1.147,-2.183 1.299,-2.183 ; 1.147,-2.157 1.299,-2.157 ; 1.147,-2.132 1.325,-2.132 ; 1.147,-1.624 1.35,-1.624 ; 1.147,-1.345 1.579,-1.345 ; 1.172,-4.901 1.35,-4.901 ; 1.172,-2.234 1.249,-2.234 ; 1.172,-2.107 1.299,-2.107 ; 1.198,-2.259 1.249,-2.259 ; 1.198,-2.081 1.299,-2.081 ; 1.198,-2.056 1.299,-2.056 ; 1.198,-1.599 1.35,-1.599 ; 1.198,-1.573 1.35,-1.573 ; 1.223,-4.926 1.452,-4.926 ; 1.249,-4.951 1.477,-4.951 ; 1.249,-2.03 1.426,-2.03 ; 1.249,-2.005 1.452,-2.005 ; 1.249,-1.548 1.325,-1.548 ; 1.274,-3.021 2.214,-3.021 ; 1.274,-1.98 1.477,-1.98 ; 1.299,-1.954 1.477,-1.954 ; 1.299,-1.446 1.401,-1.446 ; 1.325,-3.046 2.29,-3.046 ; 1.325,-1.472 1.35,-1.472 ; 1.35,-4.977 1.604,-4.977 ; 1.35,-1.929 1.503,-1.929 ; 1.35,-1.319 1.604,-1.319 ; 1.35,-1.294 1.63,-1.294 ; 1.376,-5.002 1.63,-5.002 ; 1.376,-1.903 1.528,-1.903 ; 1.401,-1.878 1.528,-1.878 ; 1.401,-1.268 1.655,-1.268 ; 1.426,-1.853 1.528,-1.853 ; 1.452,-5.104 1.528,-5.104 ; 1.452,-5.078 1.528,-5.078 ; 1.452,-5.028 1.833,-5.028 ; 1.452,-1.827 1.503,-1.827 ; 1.477,-5.231 1.579,-5.231 ; 1.477,-5.205 1.579,-5.205 ; 1.477,-5.18 1.579,-5.18 ; 1.477,-5.155 1.553,-5.155 ; 1.477,-5.129 1.528,-5.129 ; 1.477,-5.053 1.934,-5.053 ; 1.477,-2.64 1.528,-2.64 ; 1.477,-2.615 1.528,-2.615 ; 1.477,-2.589 1.528,-2.589 ; 1.477,-2.564 1.553,-2.564 ; 1.477,-2.538 1.68,-2.538 ; 1.477,-2.513 1.68,-2.513 ; 1.477,-1.7 1.579,-1.7 ; 1.477,-1.675 1.579,-1.675 ; 1.477,-1.649 1.68,-1.649 ; 1.477,-1.624 1.706,-1.624 ; 1.503,-2.488 1.706,-2.488 ; 1.503,-1.599 1.706,-1.599 ; 1.503,-1.243 1.884,-1.243 ; 1.528,-5.282 1.655,-5.282 ; 1.528,-5.256 1.63,-5.256 ; 1.528,-2.462 1.706,-2.462 ; 1.528,-1.573 1.706,-1.573 ; 1.528,-1.218 1.909,-1.218 ; 1.553,-2.437 1.706,-2.437 ; 1.553,-1.548 1.706,-1.548 ; 1.579,-5.332 1.757,-5.332 ; 1.579,-5.307 1.731,-5.307 ; 1.579,-2.411 1.706,-2.411 ; 1.579,-2.386 1.706,-2.386 ; 1.579,-2.361 1.731,-2.361 ; 1.579,-1.522 1.706,-1.522 ; 1.579,-1.497 1.731,-1.497 ; 1.579,-1.192 1.934,-1.192 ; 1.604,-2.335 1.757,-2.335 ; 1.604,-1.167 1.96,-1.167 ; 1.63,-5.358 1.858,-5.358 ; 1.63,-2.31 1.757,-2.31 ; 1.63,-1.472 1.782,-1.472 ; 1.655,-5.383 1.934,-5.383 ; 1.655,-3.072 3.636,-3.072 ; 1.655,-2.284 1.757,-2.284 ; 1.655,-1.446 1.782,-1.446 ; 1.68,-5.078 3.281,-5.078 ; 1.731,-5.104 3.23,-5.104 ; 1.757,-5.409 2.112,-5.409 ; 1.782,-5.434 2.163,-5.434 ; 1.782,-1.268 1.884,-1.268 ; 1.807,-5.459 2.315,-5.459 ; 1.807,-1.294 1.858,-1.294 ; 1.858,-1.141 2.163,-1.141 ; 1.884,-3.097 3.458,-3.097 ; 1.884,-1.116 2.976,-1.116 ; 1.934,-1.091 2.747,-1.091 ; 1.96,-5.485 3.179,-5.485 ; 1.96,-1.065 1.985,-1.065 ; 1.985,-5.129 3.001,-5.129 ; 1.985,-1.167 2.112,-1.167 ; 2.011,-5.51 3.128,-5.51 ; 2.011,-1.192 2.087,-1.192 ; 2.036,-5.155 2.9,-5.155 ; 2.061,-1.065 2.544,-1.065 ; 2.163,-1.04 2.188,-1.04 ; 2.188,-5.18 2.722,-5.18 ; 2.188,-1.141 2.392,-1.141 ; 2.239,-1.167 2.315,-1.167 ; 2.265,-1.192 2.315,-1.192 ; 2.392,-1.04 2.417,-1.04 ; 2.417,-1.141 3.001,-1.141 ; 2.468,-5.536 2.696,-5.536 ; 2.493,-1.167 2.646,-1.167 ; 2.519,-1.192 2.595,-1.192 ; 2.62,-1.065 2.696,-1.065 ; 2.696,-1.167 3.255,-1.167 ; 2.722,-1.192 3.535,-1.192 ; 2.747,-5.18 2.798,-5.18 ; 2.747,-1.218 2.849,-1.218 ; 2.773,-1.243 2.823,-1.243 ; 2.849,-5.459 3.306,-5.459 ; 2.925,-1.218 3.585,-1.218 ; 2.95,-5.434 3.357,-5.434 ; 2.976,-1.243 3.077,-1.243 ; 3.027,-3.046 3.89,-3.046 ; 3.052,-5.409 3.382,-5.409 ; 3.052,-5.053 3.484,-5.053 ; 3.077,-1.141 3.128,-1.141 ; 3.128,-5.028 3.509,-5.028 ; 3.154,-1.243 3.611,-1.243 ; 3.179,-3.021 3.941,-3.021 ; 3.179,-1.268 3.357,-1.268 ; 3.204,-1.319 3.331,-1.319 ; 3.204,-1.294 3.331,-1.294 ; 3.23,-5.383 3.458,-5.383 ; 3.255,-5.358 3.484,-5.358 ; 3.255,-1.345 3.306,-1.345 ; 3.331,-1.167 3.484,-1.167 ; 3.357,-5.002 3.712,-5.002 ; 3.382,-5.332 3.535,-5.332 ; 3.382,-4.977 3.712,-4.977 ; 3.408,-5.307 3.56,-5.307 ; 3.458,-1.268 3.763,-1.268 ; 3.484,-5.282 3.611,-5.282 ; 3.484,-5.256 3.636,-5.256 ; 3.484,-1.319 3.814,-1.319 ; 3.484,-1.294 3.789,-1.294 ; 3.509,-1.345 3.814,-1.345 ; 3.535,-5.231 3.662,-5.231 ; 3.535,-4.951 3.789,-4.951 ; 3.535,-1.37 3.636,-1.37 ; 3.56,-5.205 3.662,-5.205 ; 3.585,-5.18 3.687,-5.18 ; 3.585,-4.926 3.814,-4.926 ; 3.585,-2.996 4.068,-2.996 ; 3.611,-5.155 3.687,-5.155 ; 3.611,-5.129 3.712,-5.129 ; 3.611,-5.104 3.712,-5.104 ; 3.636,-5.078 3.712,-5.078 ; 3.636,-5.053 3.712,-5.053 ; 3.636,-5.028 3.712,-5.028 ; 3.662,-2.513 3.814,-2.513 ; 3.662,-2.488 3.814,-2.488 ; 3.662,-2.462 3.789,-2.462 ; 3.687,-4.901 3.916,-4.901 ; 3.687,-2.97 4.144,-2.97 ; 3.687,-2.538 3.839,-2.538 ; 3.712,-4.875 3.941,-4.875 ; 3.712,-2.64 3.941,-2.64 ; 3.712,-2.615 3.916,-2.615 ; 3.712,-2.589 3.89,-2.589 ; 3.712,-2.564 3.865,-2.564 ; 3.712,-1.421 3.941,-1.421 ; 3.712,-1.395 3.916,-1.395 ; 3.712,-1.37 3.839,-1.37 ; 3.738,-4.85 3.966,-4.85 ; 3.763,-2.945 4.22,-2.945 ; 3.763,-1.446 3.941,-1.446 ; 3.789,-2.665 3.941,-2.665 ; 3.814,-4.824 4.043,-4.824 ; 3.814,-2.742 3.941,-2.742 ; 3.814,-2.716 3.941,-2.716 ; 3.814,-2.691 3.941,-2.691 ; 3.814,-1.497 4.119,-1.497 ; 3.814,-1.472 4.017,-1.472 ; 3.839,-2.767 3.941,-2.767 ; 3.839,-1.573 3.966,-1.573 ; 3.839,-1.548 4.347,-1.548 ; 3.839,-1.522 4.17,-1.522 ; 3.865,-4.799 4.043,-4.799 ; 3.865,-1.599 3.941,-1.599 ; 3.941,-4.774 4.119,-4.774 ; 3.966,-4.748 4.144,-4.748 ; 3.992,-2.919 4.347,-2.919 ; 3.992,-2.208 4.17,-2.208 ; 3.992,-2.183 4.17,-2.183 ; 3.992,-2.157 4.119,-2.157 ; 3.992,-1.929 4.271,-1.929 ; 3.992,-1.903 4.246,-1.903 ; 3.992,-1.573 4.373,-1.573 ; 4.017,-2.894 4.373,-2.894 ; 4.017,-2.132 4.093,-2.132 ; 4.043,-4.723 4.22,-4.723 ; 4.043,-4.697 4.22,-4.697 ; 4.043,-1.878 4.22,-1.878 ; 4.043,-1.853 4.195,-1.853 ; 4.043,-1.624 4.373,-1.624 ; 4.043,-1.599 4.373,-1.599 ; 4.068,-1.827 4.144,-1.827 ; 4.068,-1.649 4.22,-1.649 ; 4.093,-2.31 4.271,-2.31 ; 4.093,-2.284 4.271,-2.284 ; 4.093,-2.259 4.22,-2.259 ; 4.093,-2.234 4.195,-2.234 ; 4.093,-1.675 4.17,-1.675 ; 4.119,-4.672 4.271,-4.672 ; 4.119,-1.7 4.144,-1.7 ; 4.17,-4.647 4.297,-4.647 ; 4.17,-2.386 4.297,-2.386 ; 4.17,-2.361 4.271,-2.361 ; 4.17,-2.335 4.271,-2.335 ; 4.17,-1.954 4.271,-1.954 ; 4.195,-4.621 4.322,-4.621 ; 4.195,-2.869 4.5,-2.869 ; 4.195,-2.437 4.322,-2.437 ; 4.195,-2.411 4.322,-2.411 ; 4.195,-2.005 4.297,-2.005 ; 4.195,-1.98 4.271,-1.98 ; 4.22,-4.596 4.347,-4.596 ; 4.22,-2.462 4.347,-2.462 ; 4.22,-2.081 4.373,-2.081 ; 4.22,-2.056 4.373,-2.056 ; 4.22,-2.03 4.322,-2.03 ; 4.22,-1.522 4.322,-1.522 ; 4.246,-4.57 4.373,-4.57 ; 4.246,-2.488 4.347,-2.488 ; 4.271,-4.545 4.424,-4.545 ; 4.271,-2.843 4.551,-2.843 ; 4.271,-2.538 4.347,-2.538 ; 4.271,-2.513 4.373,-2.513 ; 4.271,-1.649 4.398,-1.649 ; 4.297,-4.52 4.449,-4.52 ; 4.297,-2.107 4.398,-2.107 ; 4.297,-1.7 4.5,-1.7 ; 4.297,-1.675 4.449,-1.675 ; 4.322,-4.494 4.474,-4.494 ; 4.322,-2.208 4.373,-2.208 ; 4.322,-2.183 4.398,-2.183 ; 4.322,-2.157 4.398,-2.157 ; 4.322,-2.132 4.398,-2.132 ; 4.322,-1.751 4.525,-1.751 ; 4.322,-1.726 4.5,-1.726 ; 4.347,-4.469 4.5,-4.469 ; 4.398,-4.443 4.525,-4.443 ; 4.398,-2.818 4.652,-2.818 ; 4.398,-1.776 4.551,-1.776 ; 4.424,-4.418 4.551,-4.418 ; 4.424,-2.792 4.678,-2.792 ; 4.424,-1.802 4.551,-1.802 ; 4.449,-4.393 4.551,-4.393 ; 4.449,-1.929 4.678,-1.929 ; 4.449,-1.903 4.652,-1.903 ; 4.449,-1.878 4.601,-1.878 ; 4.449,-1.853 4.576,-1.853 ; 4.449,-1.827 4.576,-1.827 ; 4.474,-4.367 4.576,-4.367 ; 4.5,-4.342 4.601,-4.342 ; 4.5,-4.316 4.601,-4.316 ; 4.525,-4.291 4.627,-4.291 ; 4.525,-2.767 4.754,-2.767 ; 4.525,-1.954 4.703,-1.954 ; 4.551,-4.266 4.652,-4.266 ; 4.551,-4.24 4.678,-4.24 ; 4.551,-2.742 4.779,-2.742 ; 4.551,-1.98 4.728,-1.98 ; 4.576,-2.157 4.83,-2.157 ; 4.576,-2.132 4.83,-2.132 ; 4.576,-2.107 4.805,-2.107 ; 4.601,-4.215 4.703,-4.215 ; 4.601,-4.189 4.728,-4.189 ; 4.601,-2.183 4.83,-2.183 ; 4.601,-2.081 4.779,-2.081 ; 4.601,-2.056 4.779,-2.056 ; 4.601,-2.03 4.728,-2.03 ; 4.601,-2.005 4.728,-2.005 ; 4.627,-4.164 4.728,-4.164 ; 4.627,-4.139 4.728,-4.139 ; 4.627,-2.716 4.805,-2.716 ; 4.627,-2.208 4.652,-2.208 ; 4.652,-4.113 4.779,-4.113 ; 4.652,-2.691 4.83,-2.691 ; 4.678,-4.088 4.779,-4.088 ; 4.678,-2.665 4.855,-2.665 ; 4.703,-4.062 4.779,-4.062 ; 4.703,-2.208 4.83,-2.208 ; 4.728,-4.037 4.805,-4.037 ; 4.728,-4.012 4.83,-4.012 ; 4.728,-3.986 4.83,-3.986 ; 4.728,-3.961 4.83,-3.961 ; 4.728,-2.64 4.881,-2.64 ; 4.728,-2.361 4.906,-2.361 ; 4.728,-2.335 4.881,-2.335 ; 4.728,-2.31 4.881,-2.31 ; 4.728,-2.284 4.881,-2.284 ; 4.728,-2.234 4.855,-2.234 ; 4.754,-3.935 4.83,-3.935 ; 4.754,-2.615 4.881,-2.615 ; 4.754,-2.386 4.932,-2.386 ; 4.754,-2.259 4.881,-2.259 ; 4.779,-3.91 4.855,-3.91 ; 4.779,-3.885 4.881,-3.885 ; 4.779,-3.859 4.881,-3.859 ; 4.779,-2.589 4.881,-2.589 ; 4.779,-2.564 5.008,-2.564 ; 4.779,-2.411 4.932,-2.411 ; 4.805,-3.834 4.881,-3.834 ; 4.805,-3.808 4.881,-3.808 ; 4.805,-2.437 4.957,-2.437 ; 4.83,-3.783 4.906,-3.783 ; 4.83,-3.758 4.906,-3.758 ; 4.83,-3.732 4.932,-3.732 ; 4.83,-3.707 4.932,-3.707 ; 4.83,-3.681 4.932,-3.681 ; 4.83,-2.538 5.008,-2.538 ; 4.83,-2.513 5.008,-2.513 ; 4.83,-2.488 5.008,-2.488 ; 4.83,-2.462 4.982,-2.462 ; 4.855,-3.656 4.932,-3.656 ; 4.855,-3.631 4.932,-3.631 ; 4.881,-3.605 4.957,-3.605 ; 4.881,-3.58 4.957,-3.58 ; 4.881,-3.554 4.982,-3.554 ; 4.881,-3.529 4.982,-3.529 ; 4.881,-3.504 4.982,-3.504 ; 4.881,-3.478 5.008,-3.478 ; 4.881,-3.453 5.008,-3.453 ; 4.881,-3.427 5.008,-3.427 ; 4.906,-3.402 5.008,-3.402 ; 4.906,-3.377 5.008,-3.377 ; 4.906,-3.351 5.008,-3.351 ; 4.906,-3.326 5.008,-3.326 ; 4.906,-3.3 5.008,-3.3 ; 4.906,-3.275 5.008,-3.275 ; 4.906,-3.25 5.008,-3.25 ; 4.906,-3.224 5.008,-3.224 ; 4.906,-3.199 5.008,-3.199 ; 4.932,-3.173 5.008,-3.173 ; 4.932,-3.148 5.008,-3.148 ; 4.932,-3.123 5.033,-3.123 ; 4.932,-3.097 5.033,-3.097 ; 4.932,-3.072 5.033,-3.072 ; 4.932,-3.046 5.033,-3.046 ; 4.932,-3.021 5.033,-3.021 ; 4.932,-2.996 5.033,-2.996 ; 4.932,-2.97 5.033,-2.97 ; 4.932,-2.945 5.033,-2.945 ; 4.932,-2.919 5.033,-2.919 ; 4.932,-2.894 5.059,-2.894 ; 4.932,-2.869 5.059,-2.869 ; 4.932,-2.843 5.059,-2.843 ; 4.932,-2.818 5.059,-2.818 ; 4.932,-2.792 5.059,-2.792 ; 4.932,-2.767 5.033,-2.767 ; 4.932,-2.742 5.033,-2.742 ; 4.932,-2.716 5.033,-2.716 ; 4.932,-2.691 5.033,-2.691 ; 4.932,-2.665 5.033,-2.665 ; 4.932,-2.64 5.033,-2.64 ; 4.932,-2.615 5.033,-2.615 ; 4.932,-2.589 5.008,-2.589

## Polygon pours and split planes (outlines as drawn)
GND on Bottom Layer "Bottom Layer-GND" (solid, pour order 54): 0,0 0,-43 38,-43 38,0
GND on Bottom Layer "Bottom Layer-GND 1" (solid, pour order 30): 38,0
GND on Top Layer "Top Layer-GND 1" (solid, pour order 52): 0,0 0,-43 38,-43 38,0
GND on Top Layer "Top Layer-GND" (solid, pour order 8): 43.5,3.5

## Keep-outs
Keep-Out Layer:
  lines w0.2: 37.649,-43 0.322,-43 cw(c0.322,-42.678) 0,-42.678 0,-0.322 cw(c0.322,-0.322) 0.322,0 37.678,0 cw(c37.678,-0.322) 38,-0.322 38,-42.619 cw(c37.649,-42.619) 37.649,-42.971

## Other copper
Top Layer:
  text "R-Plan" at 0.969,-6.4 h0.6
  text "L B" at 1.65,-7.394 h0.6

## Silkscreen, mask and mechanical layers (free items; w line width, h text height)
Top Overlay:
  circle w0.254: c7.5,-5 r2.5
  circle w0.254: c19,-5 r4.3
  circle w0.254: c30.5,-5.5 r5
  lines w0.2: 6,-41 32,-41 32,-11 6,-11 6,-41 ; 8,-41.5 8,-41 30,-41 30,-41.5 8,-41.5
Top Solder:
  drawing of 560 lines, arcs and shapes, not listed
  text "R-Plan" at 0.969,-6.4 h0.6
  text "L B" at 1.65,-7.394 h0.6

## Text inside footprints (layer, text, board x,y; h text height)
J_SPK1: Mechanical 1 "-" at 29.984,-10.803 h0.64 r180; Mechanical 1 "+" at 31.508,-10.803 h0.64 r180
MIC1: Mechanical 1 "-" at 8.521,-7.374 h0.64 r180; Mechanical 1 "+" at 6.997,-7.374 h0.64 r180